# EAGLE board 4550 design_bkp (EAGLE 5.08)
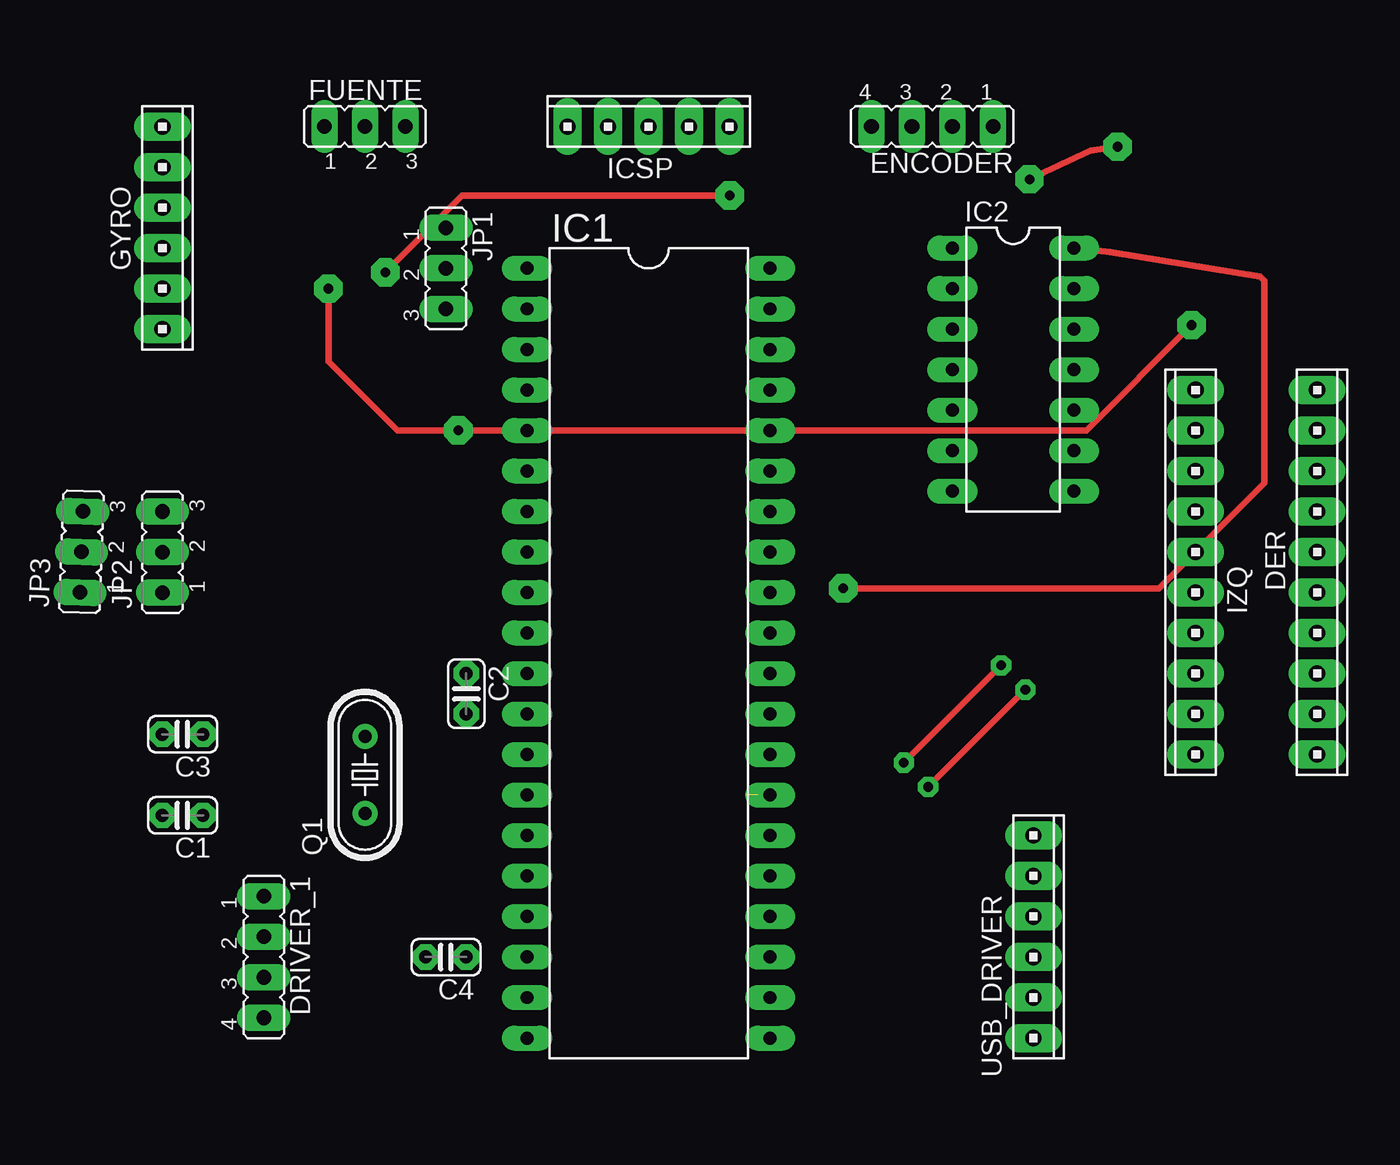
[diagram p0: board, top side]
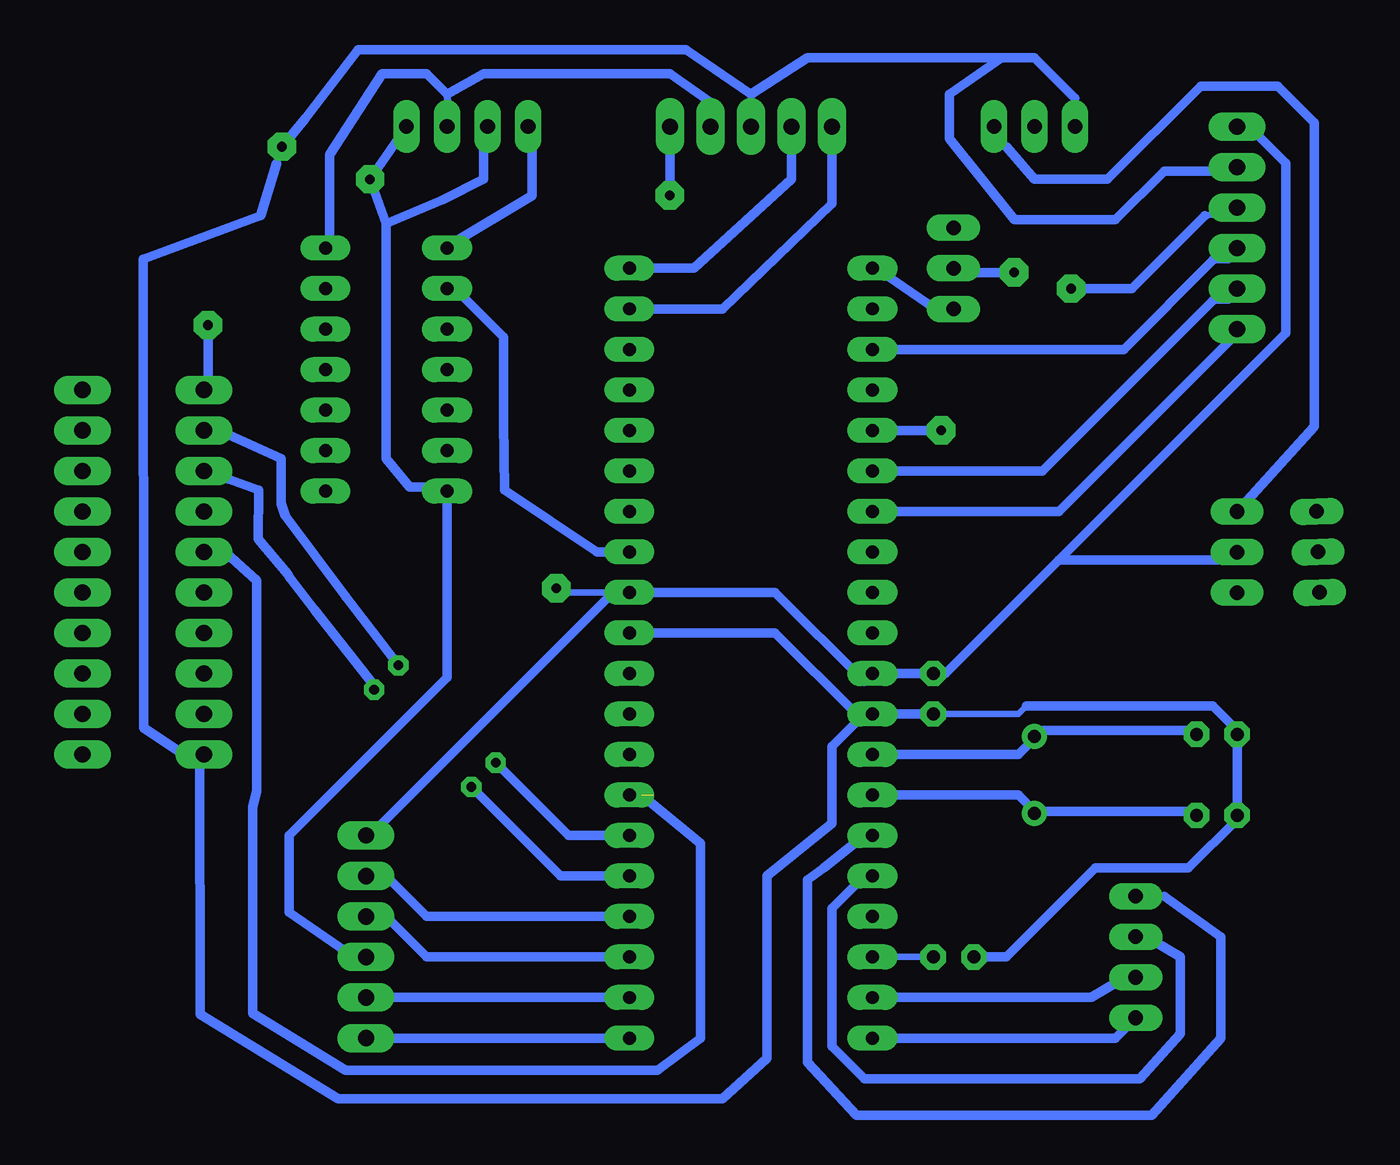
[diagram p1: board, bottom side, seen from below]

No outline drawn. Coordinates in mm, seen from the top.
Copper layers (1*2*16): Top 0.035mm / dielectric 1.5mm / Route2 0.035mm / dielectric 0.5mm / Bottom 0.035mm
Design rules "default *": minimum track width 16mil, minimum drill 24mil, track to track 18mil, track to pad 18mil, pad to pad 18mil, via to via 18mil, smd to smd 8mil, copper to edge 40mil, drill to drill 8mil, minimum pad ring 15mil, minimum via ring 8mil, stop-mask expansion 4mil, vias tented up to drill 0mil, thermal gap 10mil

## Footprints (pad centres in the part's own frame; a part is rotated, then mirrored left to right if it is on the bottom)
C025-024X044 = drill 0.813 octagon: 1 -1.27,0; 2 1.27,0
10X10MTA = drill 1.016 long: 1 11.43,0; 2 8.89,0; 3 6.35,0; 4 3.81,0; 5 1.27,0; 6 -1.27,0; 7 -3.81,0; 8 -6.35,0; 9 -8.89,0; 10 -11.43,0
JP4 = drill 0.914 long: 1 -3.81,0; 2 -1.27,0; 3 1.27,0; 4 3.81,0
JP2 = drill 0.914 long: 1 -2.54,0; 2 0,0; 3 2.54,0
10X06MTA = drill 1.016 long: 1 6.35,0; 2 3.81,0; 3 1.27,0; 4 -1.27,0; 5 -3.81,0; 6 -6.35,0
DIL40 = drill 0.813 long: 1 -24.13,-7.62; 2 -21.59,-7.62; 3 -19.05,-7.62; 4 -16.51,-7.62; 5 -13.97,-7.62; 6 -11.43,-7.62; 7 -8.89,-7.62; 8 -6.35,-7.62; 9 -3.81,-7.62; 10 -1.27,-7.62; 11 1.27,-7.62; 12 3.81,-7.62; 13 6.35,-7.62; 14 8.89,-7.62; 15 11.43,-7.62; 16 13.97,-7.62; 17 16.51,-7.62; 18 19.05,-7.62; 19 21.59,-7.62; 20 24.13,-7.62; 21 24.13,7.62; 22 21.59,7.62; 23 19.05,7.62; 24 16.51,7.62; 25 13.97,7.62; 26 11.43,7.62; 27 8.89,7.62; 28 6.35,7.62; 29 3.81,7.62; 30 1.27,7.62; 31 -1.27,7.62; 32 -3.81,7.62; 33 -6.35,7.62; 34 -8.89,7.62; 35 -11.43,7.62; 36 -13.97,7.62; 37 -16.51,7.62; 38 -19.05,7.62; 39 -21.59,7.62; 40 -24.13,7.62
DIL14 = drill 0.813 long: 1 -7.62,-3.81; 2 -5.08,-3.81; 3 -2.54,-3.81; 4 0,-3.81; 5 2.54,-3.81; 6 5.08,-3.81; 7 7.62,-3.81; 8 7.62,3.81; 9 5.08,3.81; 10 2.54,3.81; 11 0,3.81; 12 -2.54,3.81; 13 -5.08,3.81; 14 -7.62,3.81
10X05MTA = drill 1.016 long: 1 5.08,0; 2 2.54,0; 3 0,0; 4 -2.54,0; 5 -5.08,0
JP2Y = drill 0.914 long: 1 -2.54,0; 2 0,0; 3 2.54,0
HC49/S = drill 0.813 round: 1 -2.413,0; 2 2.413,0

## Placement (x,y rotation side)
C1  [C025-024X044]  39.37,29.21 180 top
C2  [C025-024X044]  57.15,36.83 270 top
C3  [C025-024X044]  39.37,34.29 180 top
C4  [C025-024X044]  55.88,20.32 180 top
DER  [10X10MTA]  110.49,44.45 270 top
DRIVER_1  [JP4]  44.45,20.32 270 top
ENCODER  [JP4]  86.36,72.39 180 top
FUENTE  [JP2]  50.8,72.39 0 top
GYRO  [10X06MTA]  38.1,66.04 270 top
IC1  PIC18F4455_40  [DIL40]  68.58,39.37 270 top
IC2  74ALS04N  [DIL14]  91.44,57.15 270 top
ICSP  [10X05MTA]  68.58,72.39 0 top
IZQ  [10X10MTA]  102.87,44.45 90 top
JP1  [JP2]  55.88,63.5 270 top
JP2  [JP2Y]  38.11,45.71 90 top
JP3  [JP2Y]  33.02,45.72 88 top
Q1  [HC49/S]  50.8,31.75 90 top
USB_DRIVER  [10X06MTA]  92.71,21.59 270 top

## Library data of the parts
C1-C4 = rcl
DER GYRO ICSP IZQ USB_DRIVER = con-amp
DRIVER_1 ENCODER FUENTE JP1-JP3 = jumper
IC1 = microchip
IC2 = 74xx-eu
Q1 = crystal

## Nets
GND: C1.2 C2.2 C3.2 C4.2 ENCODER.1 ENCODER.3 FUENTE.1 GYRO.5 IC1.12 IC1.31 IC2.7 ICSP.3 IZQ.10 USB_DRIVER.3
N$1: FUENTE.3
N$2: C3.1 IC1.13 Q1.2
N$3: C1.1 IC1.14 Q1.1
N$4: IC1.33 IC2.2
N$5: ENCODER.4 IC2.1
N$7: GYRO.3 IC1.3
N$8: GYRO.2 IC1.6
N$9: GYRO.1 IC1.7
N$10: IC1.1 JP1.3
N$11: ICSP.1 JP1.2
N$12: IC1.40 ICSP.4
N$13: IC1.39 ICSP.5
N$16: DRIVER_1.1 IC1.15
N$17: DRIVER_1.2 IC1.16
N$18: DRIVER_1.3 IC1.19
N$19: DRIVER_1.4 IC1.20
N$20: C4.1 IC1.18
N$21: IC1.21 USB_DRIVER.1
N$22: IC1.22 USB_DRIVER.2
N$23: IC1.23 USB_DRIVER.4
N$24: IC1.24 USB_DRIVER.5
N$25: IC1.26 IZQ.2
N$26: IC1.25 IZQ.3
N$27: IC1.27 IZQ.5
VCC: C2.1 ENCODER.2 GYRO.6 IC1.11 IC1.32 IC2.14 ICSP.2 USB_DRIVER.6
VPP: GYRO.4 IC1.5 IZQ.1

## Tracks (layer width: path | path; a pad name or v marks a point on that pad's centre or on a via)
GND  (via drill 0.6 pad 1.78)
  Top 0.406: v92.46,69.09 96.27,70.87 v97.98,71.13
  Bottom 0.406: 61.98,35.56 61.47,35.05 IC1.12 61.98,35.56 | C1.2 38.1,28.96 | 51.31,36.07 51.82,35.56 C2.2 | C3.2 38.1,34.54 | 48.26,74.17 FUENTE.1 | 68.58,74.42 ICSP.3 68.58,72.64 | 38.1,69.6 GYRO.5 | 87.88,49.78 IC2.7 | 85.34,72.14 ENCODER.3 | 93.47,20.32 USB_DRIVER.3 | 104.14,33.02 103.12,33.02 IZQ.10 | 98.3,70.1 98.06,71.02 v97.98,71.13 | 61.98,35.56 61.98,35.05
  Bottom 0.61: C2.2 IC1.12 | IC1.31 67.06,40.64 61.98,35.56 | C1.2 C3.2 | 38.1,28.96 41.15,25.91 46.99,25.91 52.58,20.32 C4.2 | 51.31,36.07 39.62,36.07 38.1,34.54 | 48.26,74.17 50.8,76.71 52.83,76.71 | 52.83,76.71 65.02,76.71 68.58,74.42 72.64,77.22 93.22,77.22 96.52,72.9 v97.98,71.13 | 38.1,69.6 42.67,69.6 45.72,66.55 52.07,66.55 56.13,71.63 56.13,74.42 52.83,76.71 | 87.88,49.78 89.96,49.78 91.44,51.56 91.44,66.29 | 91.44,66.29 v92.46,69.09 ENCODER.1 | 91.44,66.29 87.89,67.82 85.34,69.09 85.34,72.14 | 93.47,20.32 97.54,23.11 97.54,27.94 87.63,37.85 IC2.7 | 104.14,33.02 106.65,34.68 106.63,36.89 106.69,64.08 99.31,66.8 98.3,70.1 | 61.98,35.05 63.5,33.53 63.5,28.7 67.56,25.4 67.56,13.97 70.36,11.43 89.79,11.43 90.98,11.44 94.46,11.44 103.11,16.72 103.12,33.02
N$1
  Bottom 0.406: 52.58,71.12 52.83,71.37 53.34,72.14 FUENTE.3
  Bottom 0.61: 52.58,71.12 50.8,69.09 46.23,69.09 40.39,74.93 35.56,74.93 33.27,72.64 33.27,53.59 38.1,48.26
N$2
  Bottom 0.406: C3.1 40.64,34.54 | 50.8,34.54 Q1.2 50.8,34.04
  Bottom 0.61: 40.64,34.54 50.8,34.54 | IC1.13 51.82,33.02 50.8,34.04
N$3
  Bottom 0.406: C1.1 40.64,29.46 | 50.8,29.46 Q1.1
  Bottom 0.61: 40.64,29.46 50.8,29.46 51.82,30.48 IC1.14
N$4
  Bottom 0.406: 87.38,62.48 IC2.2
  Bottom 0.61: IC1.33 78.23,45.72 84.02,49.59 84.07,53.85 84.07,59.18 87.38,62.48
N$5
  Bottom 0.406: 87.38,65.02 IC2.1 | 82.3,72.14 ENCODER.4
  Bottom 0.61: 87.38,65.02 82.3,68.07 82.3,72.14
N$7
  Bottom 0.406: 39.62,64.01 38.61,64.01 38.1,64.52 GYRO.3
  Bottom 0.61: IC1.3 45.21,58.42 39.62,64.01
N$8
  Bottom 0.406: 39.62,61.47 38.61,61.47 38.1,61.98 GYRO.2
  Bottom 0.61: IC1.6 50.29,50.8 39.62,61.47
N$9
  Bottom 0.406: GYRO.1 38.1,59.44
  Bottom 0.61: IC1.7 49.28,48.26 38.1,59.44
N$10
  Bottom 0.406: 59.94,62.99 IC1.1 | 56.64,60.71 JP1.3
  Bottom 0.61: 56.64,60.71 59.94,62.99
N$11  (via drill 0.6 pad 1.78)
  Top 0.406: v73.66,68.07 56.9,68.07 v52.07,63.25
  Bottom 0.406: 55.63,63.25 JP1.2
  Bottom 0.61: v73.66,68.07 ICSP.1 | v52.07,63.25 55.63,63.25
N$12
  Bottom 0.61: IC1.40 72.14,63.5 66.04,69.09 ICSP.4
N$13
  Bottom 0.61: IC1.39 70.36,60.96 63.5,67.56 ICSP.5
N$16
  Bottom 0.406: 61.47,27.94 IC1.15 | 42.67,24.13 DRIVER_1.1
  Bottom 0.61: 61.47,27.94 64.01,25.91 65.02,25.15 65.02,13.72 61.98,10.41 43.43,10.41 39.12,15.24 39.12,21.59 42.67,24.13
N$17
  Bottom 0.406: 61.47,25.4 IC1.16 | 44.2,21.84 DRIVER_1.2
  Bottom 0.61: 61.47,25.4 63.5,23.37 63.5,14.73 61.47,12.7 44.2,12.7 41.66,15.49 41.66,20.32 44.2,21.84
N$18
  Bottom 0.406: DRIVER_1.3 44.7,19.3
  Bottom 0.61: IC1.19 47.24,17.78 44.7,19.3
N$19
  Bottom 0.61: IC1.20 45.72,15.24 DRIVER_1.4
N$20
  Bottom 0.406: C4.1 IC1.18
N$21
  Bottom 0.61: IC1.21 USB_DRIVER.1
N$22
  Bottom 0.61: IC1.22 USB_DRIVER.2
N$23
  Bottom 0.406: 91.95,23.37 92.46,22.86 USB_DRIVER.4
  Bottom 0.61: IC1.23 88.9,20.32 91.95,23.37
N$24
  Bottom 0.406: 91.95,25.91 92.46,25.4 USB_DRIVER.5
  Bottom 0.61: IC1.24 88.9,22.86 91.95,25.91
N$25  (via drill 0.6 pad 1.27)
  Top 0.406: v84.58,32.51 v90.68,38.61
  Bottom 0.406: 101.35,53.09 102.62,53.09 IZQ.2
  Bottom 0.61: IC1.26 80.01,27.94 v84.58,32.51 | v90.68,38.61 93.98,42.93 97.79,48.01 98.04,48.77 98.04,51.56 101.35,53.09
N$26  (via drill 0.6 pad 1.27)
  Top 0.406: v86.11,30.99 v92.2,37.08
  Bottom 0.406: v92.2,37.08 92.2,37.34 | 101.35,50.29 102.36,50.29 IZQ.3
  Bottom 0.61: IC1.25 80.52,25.4 v86.11,30.99 | 92.2,37.34 95.94,42.09 97.5,44.13 97.63,44.33 99.47,46.54 99.45,49.59 101.35,50.29
N$27  (1 unrouted)
  Bottom 0.406: 75.44,30.48 IC1.27 | 102.11,46.23 102.62,45.72 IZQ.5
  Bottom 0.61: 102.11,46.23 99.57,43.94 99.57,30.73 99.82,29.72 99.82,21.34 99.81,16.8 93.98,13.21 74.42,13.21 71.75,15.24 71.75,27.43 75.44,30.48
VCC  (via drill 0.6 pad 1.78)
  Top 0.406: v80.77,43.43 100.58,43.43 107.19,50.04 107.19,62.74 106.93,62.99 97.54,64.52 IC2.14
  Bottom 0.406: IC1.32 77.22,43.18 80.52,43.18 v80.77,43.43 | 92.46,27.94 USB_DRIVER.6 | 37.08,72.14 38.1,72.14 GYRO.6 | 56.39,38.1 C2.1 | IC1.11 61.47,37.59 | IC2.14 95,65.02 | 71.12,73.91 ICSP.2 | 38.1,45.21 38.1,45.72 | 87.63,74.42 87.38,72.64 ENCODER.2 87.63,74.42
  Bottom 0.61: 77.22,43.18 92.46,27.94 | C2.1 IC1.11 | 37.08,72.14 35.05,70.1 35.05,59.44 49.28,45.21 | 49.28,45.21 56.39,38.1 | IC1.32 67.06,43.18 61.47,37.59 | 95,65.02 95,70.61 91.69,75.69 88.9,75.69 87.63,74.42 85.34,75.69 73.66,75.69 71.12,73.91 | 38.1,45.21 49.28,45.21
VPP  (via drill 0.6 pad 1.78)
  Top 0.406: v48.51,62.23 48.51,57.66 52.83,53.34 v56.64,53.34 | v56.64,53.34 IC1.5 | v56.64,53.34 96.01,53.34 v102.62,59.94
  Bottom 0.406: 40.13,66.8 38.35,67.06 38.1,67.06 GYRO.4 | 102.62,56.13 IZQ.1
  Bottom 0.61: 40.13,66.8 44.7,62.23 v48.51,62.23 | v56.64,53.34 IC1.5 | v102.62,59.94 102.62,56.13